# EAGLE board PCB v31 (EAGLE 9.7.0)
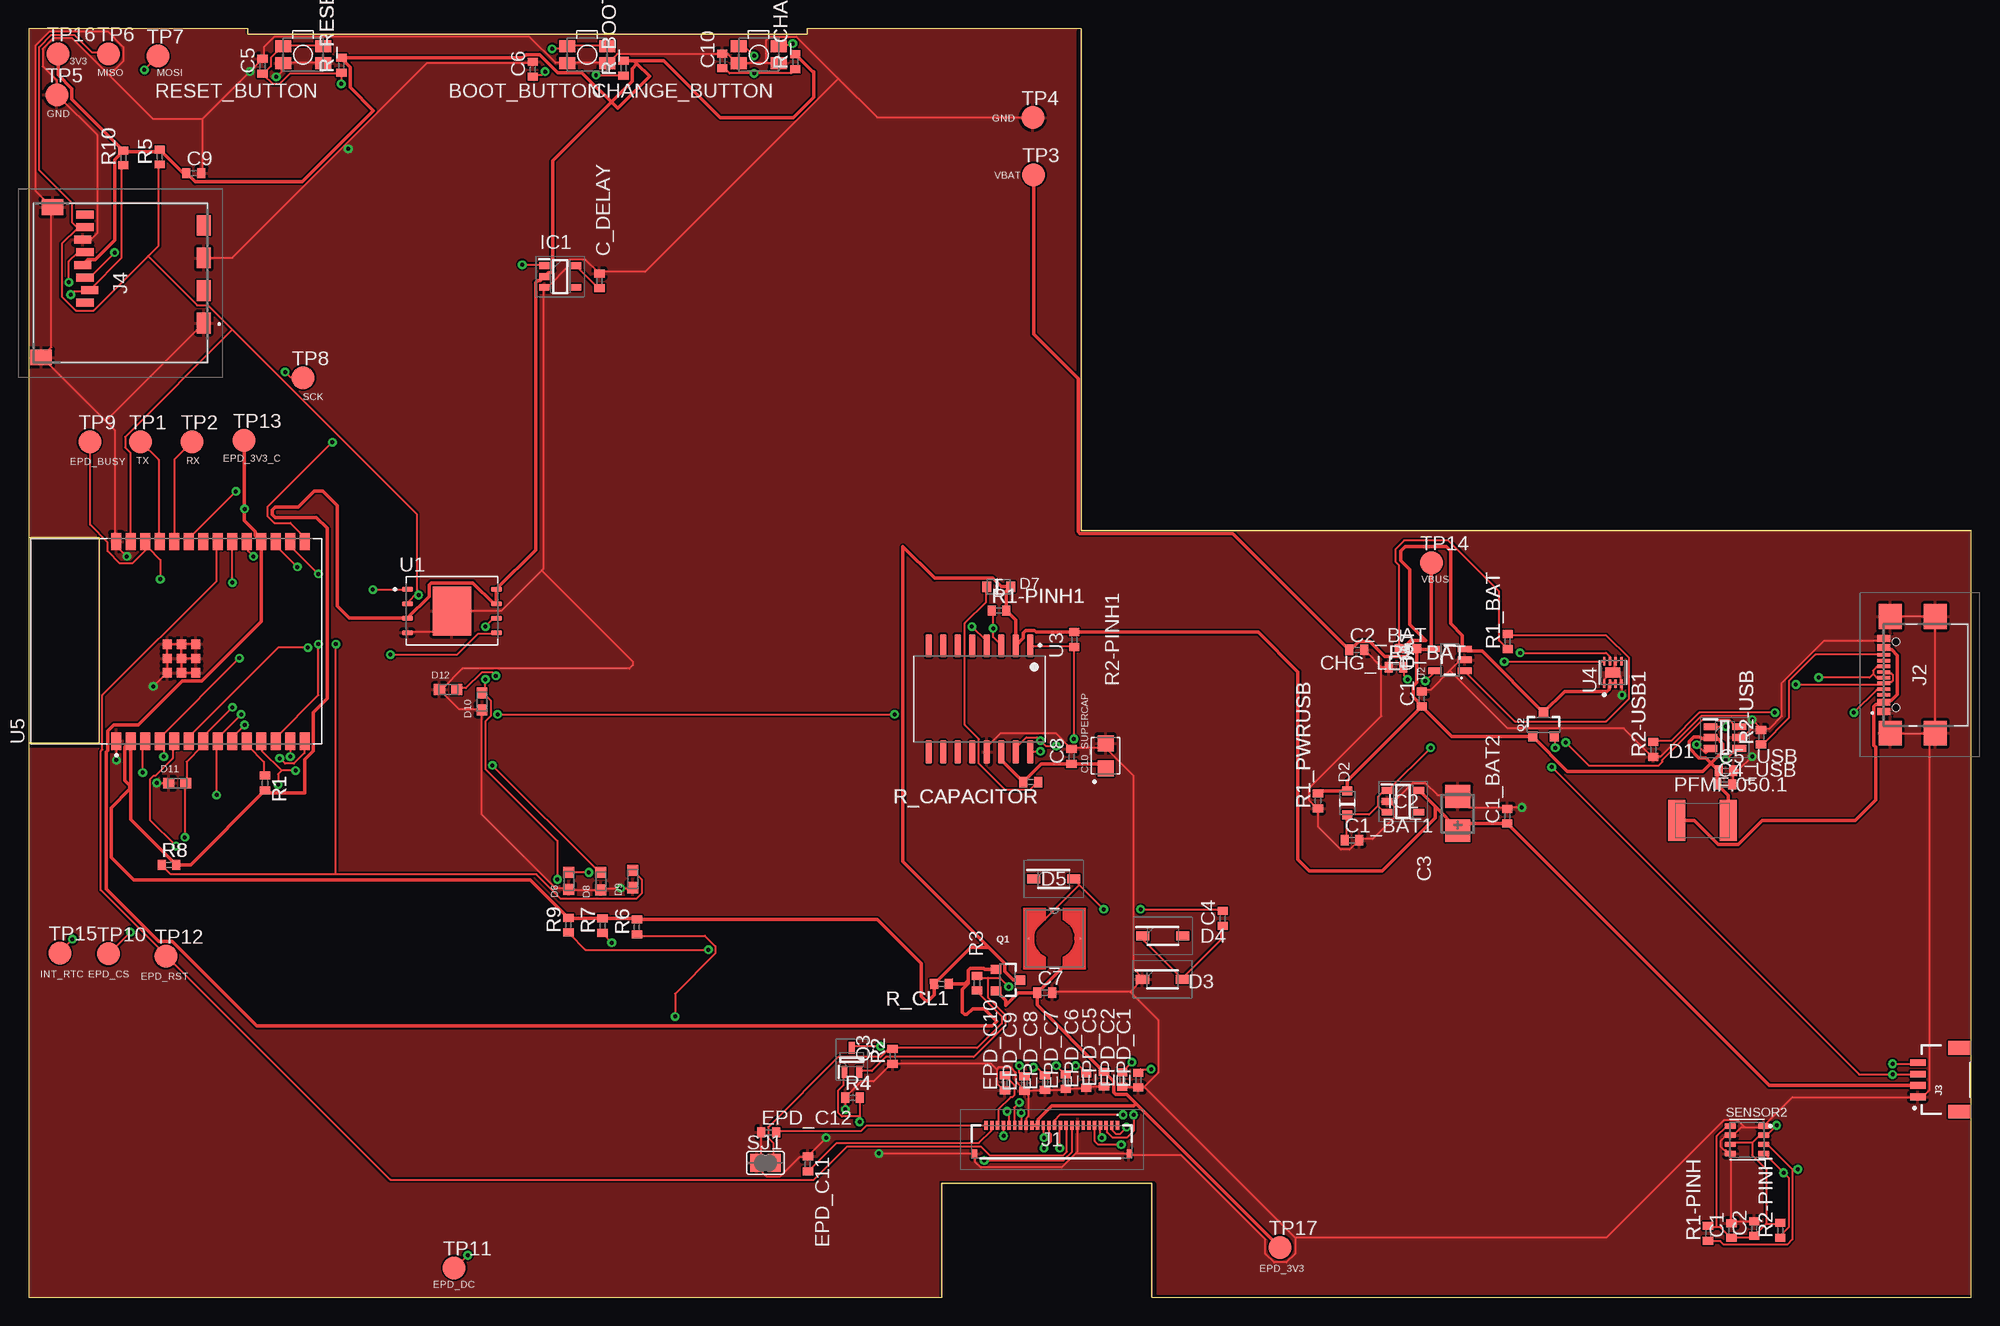
[diagram p0: board, top side]
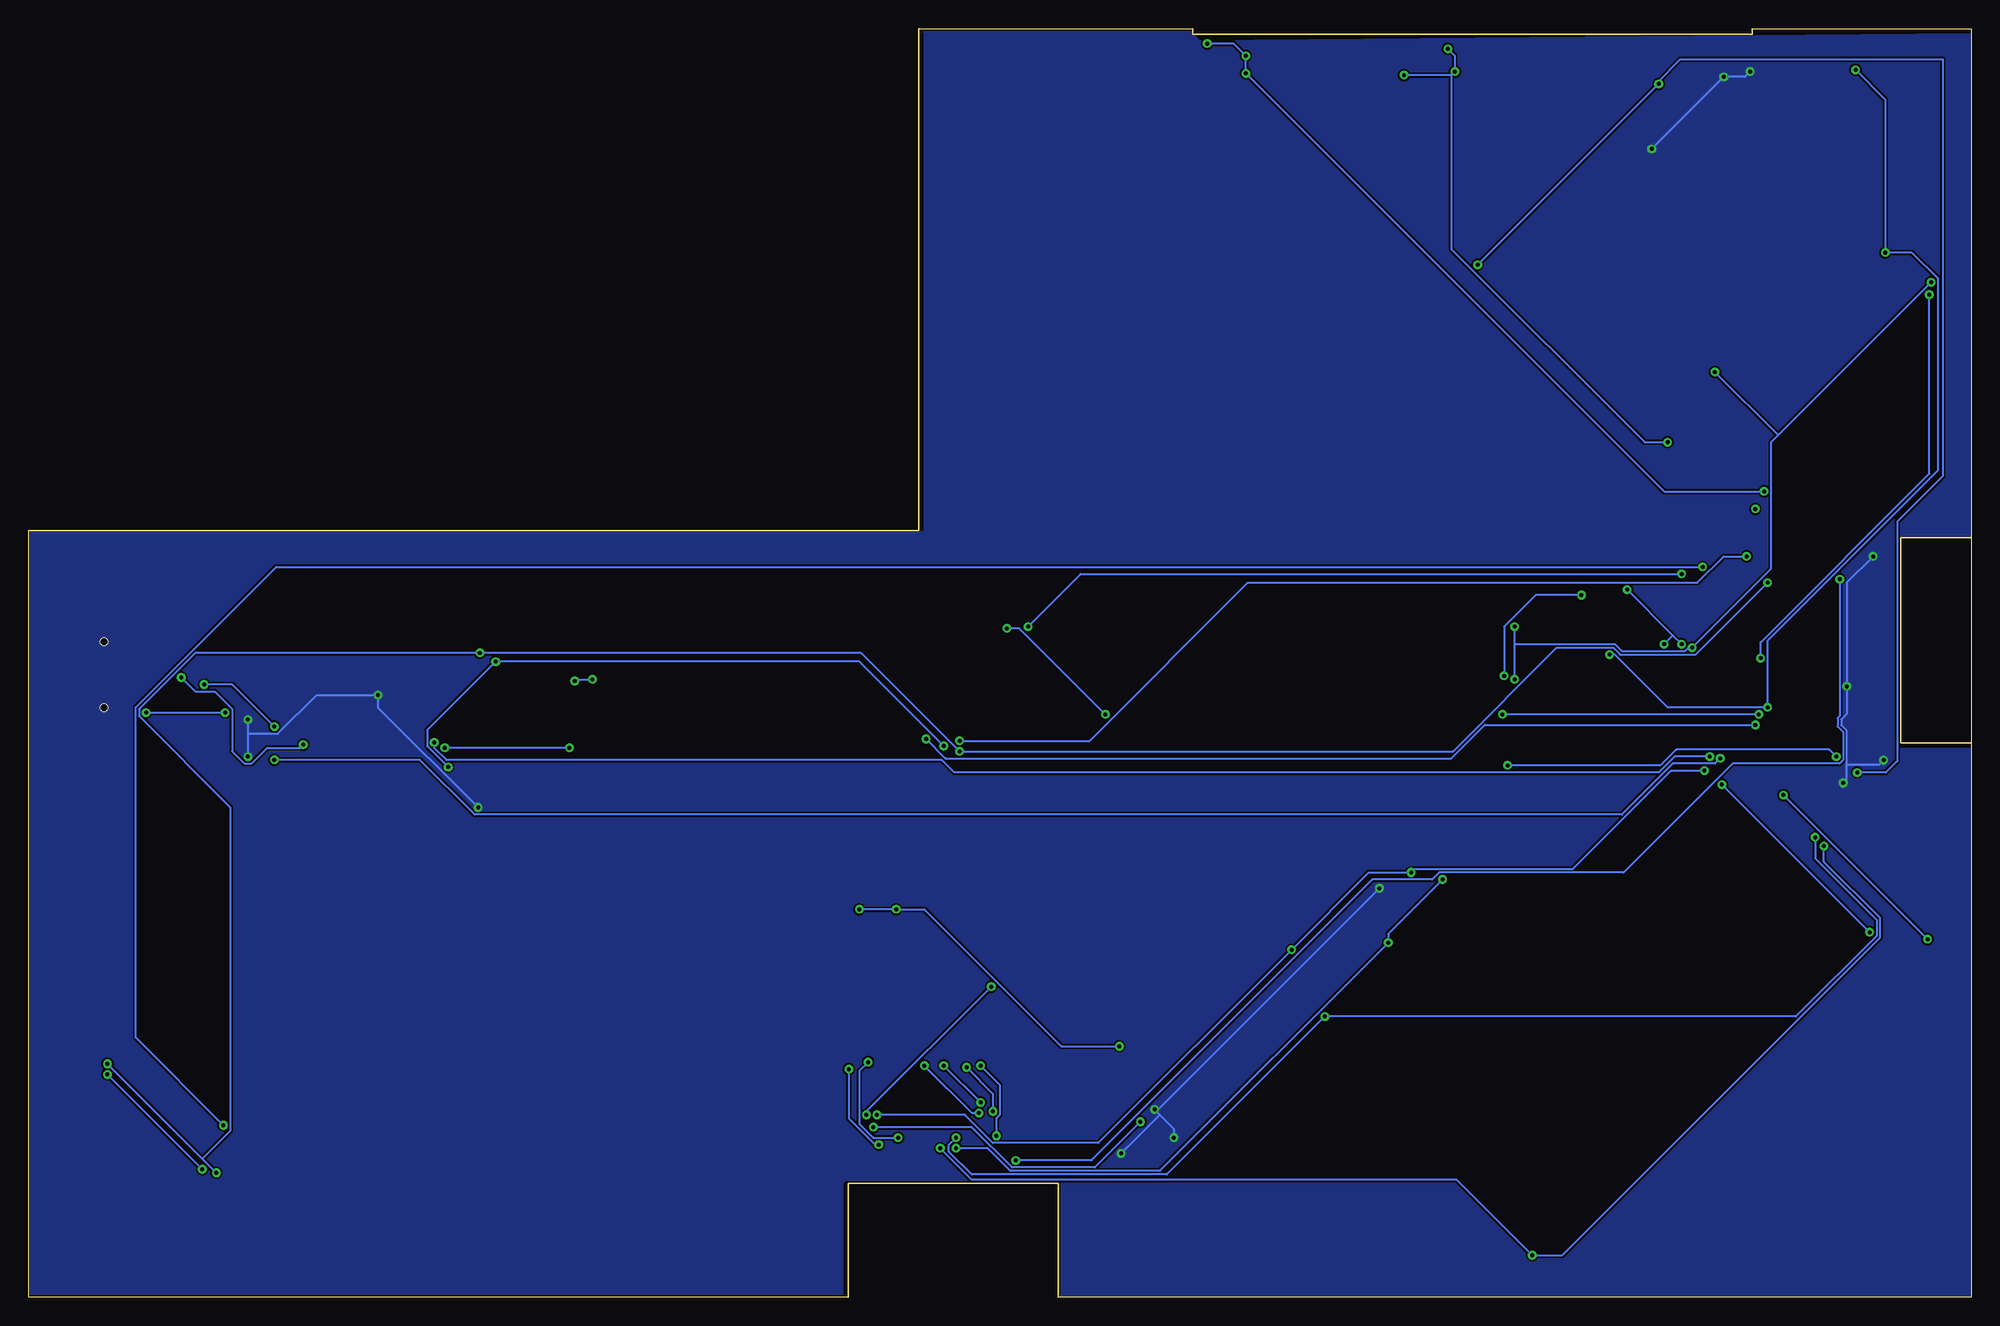
[diagram p1: board, bottom side, seen from below]

Size 170.2 x 111.2 mm. Coordinates in mm from the lower left corner, seen from the top.
Outline: 0,66.6 0,111.2 19.2,111.2 19.2,110.71 68.2,110.71 68.2,111.2 92.2,111.2 92.2,67.2 170.2,67.2 170.2,0 98.4,0 98.4,10 80,10 80,0 0,0 0,48.6
Outline: 0,66.6 0,48.6
Outline: 0,66.6 6.2,66.6 6.2,48.6 0,48.6
Copper layers (1*16): Top 0.035mm / dielectric 1.5mm / Bottom 0.035mm
Design rules "Fusion Electronics Design Rules *": minimum track width 0.1554mm, minimum drill 0.35mm, track to track 6mil, track to pad 6mil, pad to pad 6mil, via to via 6mil, smd to smd 6mil, copper to edge 0.016mm, drill to drill 6mil, minimum pad ring 10mil, minimum via ring 8mil, stop-mask expansion 4mil, vias tented up to drill 9999mil, thermal gap 10mil

## Footprints (pad centres in the part's own frame; a part is rotated, then mirrored left to right if it is on the bottom)
MYBUTTON = smd 1.4 x 1.05: 1 1.75,0.75; 2 -1.75,0.75; 3 -1.75,-0.75; 4 1.75,-0.75
ESP32_WROVER_EAGLE-LTSPICE_C0402 = smd 0.7 x 0.9: 1 -0.65,0; 2 0.65,0
EAGLE-LTSPICE_C0402 = smd 0.7 x 0.9: 1 -0.65,0; 2 0.65,0
RCL_CT3528 = smd 2 x 2.2: + -1.5,0; - 1.5,0
CAPCP3225X100N = smd 1.4 x 1.4: 1 -1.1,0; 2 1.1,0
ADAFRUIT_CHIP-LED0603 = smd 0.8 x 0.8: A 0,-0.75; C 0,0.75
SOT95P280X145-6N = smd 1.2 x 0.6: 1 -1.25,0.95; 2 -1.25,0; 3 -1.25,-0.95; 4 1.25,-0.95; 5 1.25,0; 6 1.25,0.95
ESP32_WROVER_AVX---SD0805S020S1R0_AVX_SD0805S020S1R0_0 = smd 0.8 x 0.9: 1 -1.05,0; 2 1.05,0
SOD3716X135N = smd 1.15 x 0.8: 1 -1.75,0; 2 1.75,0
DIOC1608X36N = smd 0.97 x 0.94: 1 -0.75,0; 2 0.75,0
SOT95P280X125-5N = smd 0.9 x 0.6: 1 -1.4,0.95; 2 -1.4,0; 3 -1.4,-0.95; 4 1.4,-0.95; 5 1.4,0.95
SOT95P280X120-5N = smd 0.9 x 0.6: 1 -1.4,0.95; 2 -1.4,0; 3 -1.4,-0.95; 4 1.4,-0.95; 5 1.4,0.95
FH34SRJ24S05SH99 = smd 0.3 x 0.8: 1 5.75,1.45; 2 5.25,1.45; 3 4.75,1.45; 4 4.25,1.45; 5 3.75,1.45; 6 3.25,1.45; 7 2.75,1.45; 8 2.25,1.45; 9 1.75,1.45; 10 1.25,1.45; 11 0.75,1.45; 12 0.25,1.45; 13 -0.25,1.45; 14 -0.75,1.45; 15 -1.25,1.45; 16 -1.75,1.45; 17 -2.25,1.45; 18 -2.75,1.45; 19 -3.25,1.45; 20 -3.75,1.45; 21 -4.25,1.45; 22 -4.75,1.45; 23 -5.25,1.45; 24 -5.75,1.45 | smd 0.4 x 0.8: MP1 6.75,-1.05; MP2 -6.75,-1.05
SAMACSYS_PARTS_USB4110GFA = smd 0.3 x 1.15: A1 -3.35,3.678; A4 -2.55,3.678; A5 -1.25,3.678; A6 -0.25,3.678; A7 0.25,3.678; A8 1.25,3.678; A9 2.55,3.678; A12 3.35,3.678; B1 3.05,3.678; B4 2.25,3.678; B5 1.75,3.678; B6 0.75,3.678; B7 -0.75,3.678; B8 -1.75,3.678; B9 -2.25,3.678; B12 -3.05,3.678 | smd 2.18 x 2: MP1 -5.11,-0.827; MP2 5.11,-0.827; MP3 -5.11,3.103; MP4 5.11,3.103 | hole 0.65: -2.89,2.603; 2.89,2.603
JST04_1MM_RA = smd 0.6 x 1.35: 1 -1.5,0; 2 -0.5,0; 3 0.5,0; 4 1.5,0 | smd 1.2 x 2: NC1 2.8,-3.675; NC2 -2.8,-3.675
112ATAARR03ATTEND = smd 1.8 x 1.2: G1 10.6,10.4; G2 4.9,10.4; S1 7.75,10.4; S2 2.05,10.4 | smd 1.4 x 1.9: G3 13.6,-3.85; G4 0.45,-2.85 | smd 0.7 x 1.5: P1 8.8,0; P2 7.7,0.4; P3 6.6,0; P4 5.5,-0.2; P5 4.4,0; P6 3.3,-0.2; P7 2.2,0; P8 1.1,0
IND_4828-WE-TPC_WRE = smd 0.127 x 0.127: 1 -2.286,0; 2 2.286,0
ESP32C6_VARISTOR_CT/CN1812 = smd 1.5 x 3.6: 1 -2.25,0; 2 2.25,0
ESP32_WROVER_SPARKFUN-DISCRETESEMI_SOT23-3 = smd 0.8 x 0.9: 1 -0.95,-1; 2 0.95,-1; 3 0,1.1
SOT65P210X110-3N = smd 1.05 x 0.5: 1 -1.05,0.65; 2 -1.05,-0.65; 3 1.05,0
ESP32_WROVER_EAGLE-LTSPICE_R0402 = smd 0.7 x 0.9: 1 -0.65,0; 2 0.65,0
ESP32_WROVER_BME680_PSON80P300X300X100-8N = smd 1.016 x 0.5: 1 1.458,1.2; 2 1.458,0.4; 3 1.458,-0.4; 4 1.458,-1.2; 5 -1.458,-1.22; 6 -1.458,-0.4; 7 -1.458,0.4; 8 -1.458,1.2
SJ = smd 1.168 x 1.6: 1 -0.762,0; 2 0.762,0
TP20R = smd 2 x 2: TP 0,0
SON127P600X800X80-9N = smd 0.94 x 0.44: 1 -3.895,1.905; 2 -3.895,0.635; 3 -3.895,-0.635; 4 -3.895,-1.905; 5 3.895,-1.905; 6 3.895,-0.635; 7 3.895,0.635; 8 3.895,1.905 | smd 3.4 x 4.3: 9 0,0
ESP32_WROVER_SPARKFUN-IC-POWER_SOT23-5 = smd 0.55 x 1.2: 1 -0.95,-1.3; 2 0,-1.3; 3 0.95,-1.3; 4 0.95,1.3; 5 -0.95,1.3
SOIC127P1032X265-16N = smd 2.05 x 0.59: 1 -4.655,4.445; 2 -4.655,3.175; 3 -4.655,1.905; 4 -4.655,0.635; 5 -4.655,-0.635; 6 -4.655,-1.905; 7 -4.655,-3.175; 8 -4.655,-4.445; 9 4.655,-4.445; 10 4.655,-3.175; 11 4.655,-1.905; 12 4.655,-0.635; 13 4.655,0.635; 14 4.655,1.905; 15 4.655,3.175; 16 4.655,4.445
SON50P200X200X80-9N = smd 0.76 x 0.27: 1 -0.985,0.75; 2 -0.985,0.25; 3 -0.985,-0.25; 4 -0.985,-0.75; 5 0.985,-0.75; 6 0.985,-0.25; 7 0.985,0.25; 8 0.985,0.75 | smd 0.9 x 1.3: 9 0,0
XCVR_ESP32-C6-WROOM-1-N8 = smd 1.5 x 0.9: 1 -8.75,5.26; 2 -8.75,3.99; 3 -8.75,2.72; 4 -8.75,1.45; 5 -8.75,0.18; 6 -8.75,-1.09; 7 -8.75,-2.36; 8 -8.75,-3.63; 9 -8.75,-4.9; 10 -8.75,-6.17; 11 -8.75,-7.44; 12 -8.75,-8.71; 13 -8.75,-9.98; 14 -8.75,-11.25; 15 8.75,-11.25; 16 8.75,-9.98; 17 8.75,-8.71; 18 8.75,-7.44; 19 8.75,-6.17; 20 8.75,-4.9; 21 8.75,-3.63; 22 8.75,-2.36; 23 8.75,-1.09; 24 8.75,0.18; 25 8.75,1.45; 26 8.75,2.72; 27 8.75,3.99; 28 8.75,5.26 | smd 0.8 x 0.8: 29_1 -2.755,0.79; 29_2 -1.505,0.79; 29_3 -0.255,0.79; 29_4 -2.755,-0.46; 29_5 -1.505,-0.46; 29_6 -0.255,-0.46; 29_7 -2.755,-1.71; 29_8 -1.505,-1.71; 29_9 -0.255,-1.71

## Placement (x,y rotation side)
BOOT_BUTTON  BUTTON_CUSYOMV1  [MYBUTTON]  48.93,108.91 180 top
C1  100nF  [ESP32_WROVER_EAGLE-LTSPICE_C0402]  149.17,5.86 90 top
C1_BAT  4.7uF  [ESP32_WROVER_EAGLE-LTSPICE_C0402]  122.05,52.45 90 top
C1_BAT1  4.7uF  [EAGLE-LTSPICE_C0402]  115.93,40.07 0 top
C1_BAT2  4.7uF  [EAGLE-LTSPICE_C0402]  129.53,42.17 90 top
C2  100nF  [ESP32_WROVER_EAGLE-LTSPICE_C0402]  151.17,6.04 90 top
C2_BAT  4.7uF  [ESP32_WROVER_EAGLE-LTSPICE_C0402]  116.36,56.75 0 top
C3  100uF TANT  [RCL_CT3528]  125.2,42.41 90 top
C4  4.7uF/25V  [ESP32_WROVER_EAGLE-LTSPICE_C0402]  104.61,33.21 90 top
C4_USB  100nF  [ESP32_WROVER_EAGLE-LTSPICE_C0402]  148.59,44.95 0 top
C5  1uF  [ESP32_WROVER_EAGLE-LTSPICE_C0402]  20.49,107.9 90 top
C5_USB  4.7uF  [ESP32_WROVER_EAGLE-LTSPICE_C0402]  148.7,46.15 0 top
C6  100nF  [ESP32_WROVER_EAGLE-LTSPICE_C0402]  44.17,107.62 90 top
C7  10uF  [ESP32_WROVER_EAGLE-LTSPICE_C0402]  89.02,26.71 0 top
C8  100nF  [ESP32_WROVER_EAGLE-LTSPICE_C0402]  91.37,47.4 90 top
C9  100nF  [ESP32_WROVER_EAGLE-LTSPICE_C0402]  14.48,98.53 0 top
C10  100nF  [ESP32_WROVER_EAGLE-LTSPICE_C0402]  60.77,108.36 90 top
C10_SUPERCAP  CPH3225A  [CAPCP3225X100N]  94.36,47.46 90 top
C_DELAY  100nF  [ESP32_WROVER_EAGLE-LTSPICE_C0402]  50.01,89.09 90 top
CHANGE_BUTTON  BUTTON_CUSYOMV1  [MYBUTTON]  63.96,108.91 180 top
CHG_LED  3.3  [ADAFRUIT_CHIP-LED0603]  120.85,56.87 90 top
D1  USBLC6-2SC6Y  [SOT95P280X145-6N]  148.6,49.07 0 top
D2  ESP32_WROVER_AVX---SD0805S020S1R0_AVX_SD0805S020S1R0_0_0AVX_SD0805S020S1R0_0_0  [ESP32_WROVER_AVX---SD0805S020S1R0_AVX_SD0805S020S1R0_0]  115.52,43.34 90 top
D3  MBR0530  [SOD3716X135N]  99.33,27.88 0 top
D4  MBR0530  [SOD3716X135N]  99.37,31.68 0 top
D5  MBR0530  [SOD3716X135N]  89.81,36.68 0 top
D6  PGB1010603MR  [DIOC1608X36N]  47.33,36.5 90 top
D7  ESP32_WROVER_AVX---SD0805S020S1R0_AVX_SD0805S020S1R0_0_0AVX_SD0805S020S1R0_0_0  [ESP32_WROVER_AVX---SD0805S020S1R0_AVX_SD0805S020S1R0_0]  84.99,62.28 0 top
D8  PGB1010603MR  [DIOC1608X36N]  50.13,36.48 90 top
D9  PGB1010603MR  [DIOC1608X36N]  52.93,36.66 90 top
D10  PGB1010603MR  [DIOC1608X36N]  39.73,52.24 90 top
D11  PGB1010603MR  [DIOC1608X36N]  13.02,45.07 0 top
D12  PGB1010603MR  [DIOC1608X36N]  36.75,53.28 0 top
EPD_C1  0.1uF/50V  [ESP32_WROVER_EAGLE-LTSPICE_C0402]  97.21,19.05 90 top
EPD_C2  0.1uF/50V  [ESP32_WROVER_EAGLE-LTSPICE_C0402]  95.81,19.09 90 top
EPD_C5  0.1uF/50V  [ESP32_WROVER_EAGLE-LTSPICE_C0402]  94.21,19.13 90 top
EPD_C6  1uF/50V  [ESP32_WROVER_EAGLE-LTSPICE_C0402]  92.65,19.01 90 top
EPD_C7  1uF/50V  [ESP32_WROVER_EAGLE-LTSPICE_C0402]  90.85,18.92 90 top
EPD_C8  1uF/50V  [ESP32_WROVER_EAGLE-LTSPICE_C0402]  89.05,18.83 90 top
EPD_C9  1uF/50V  [ESP32_WROVER_EAGLE-LTSPICE_C0402]  87.25,18.74 90 top
EPD_C10  1uF/50V  [ESP32_WROVER_EAGLE-LTSPICE_C0402]  85.53,18.81 90 top
EPD_C11  1uF/50V  [ESP32_WROVER_EAGLE-LTSPICE_C0402]  68.27,11.71 270 top
EPD_C12  1uF/50V  [ESP32_WROVER_EAGLE-LTSPICE_C0402]  64.85,14.47 0 top
IC1  BD5229G-TR  [SOT95P280X125-5N]  46.57,89.47 0 top
IC2  XC6220A331MR-G  [SOT95P280X120-5N]  120.41,43.47 0 top
J1  FH34SRJ-24S-0.5SH_99_  [FH34SRJ24S05SH99]  89.64,13.64 0 top
J2  SAMACSYS_PARTS_USB4110-GF-A  [SAMACSYS_PARTS_USB4110GFA]  166.2,54.56 90 top
J3  QWIIC_RIGHT_ANGLE  [JST04_1MM_RA]  165.51,19.08 90 top
J4  112A-TAAR-R03_ATTEND  [112ATAARR03ATTEND]  4.95,95.98 270 top
L1  744043680IND_4828-WE-TPC_WRE  [IND_4828-WE-TPC_WRE]  89.87,31.45 0 top
PFMF.050.1  ESP32C6_VARISTORCN1812  [ESP32C6_VARISTOR_CT/CN1812]  146.64,41.8 0 top
Q1  20V/4.2A/52mΩ/1.4W  [ESP32_WROVER_SPARKFUN-DISCRETESEMI_SOT23-3]  85.76,27.81 270 top
Q2  20V/4.2A/52mΩ/1.4W  [ESP32_WROVER_SPARKFUN-DISCRETESEMI_SOT23-3]  132.71,50.16 0 top
Q3  SI1308EDL-T1-GE3  [SOT65P210X110-3N]  72.12,20.84 90 top
R1  10k  [ESP32_WROVER_EAGLE-LTSPICE_R0402]  20.71,45.08 270 top
R1-PINH  10K  [ESP32_WROVER_EAGLE-LTSPICE_R0402]  147.13,5.63 90 top
R1-PINH1  10K  [ESP32_WROVER_EAGLE-LTSPICE_R0402]  85.01,60.19 0 top
R1_BAT  200  [ESP32_WROVER_EAGLE-LTSPICE_R0402]  129.57,57.48 90 top
R1_PWRUSB  100K  [ESP32_WROVER_EAGLE-LTSPICE_R0402]  112.96,43.52 90 top
R2  2.2  [ESP32_WROVER_EAGLE-LTSPICE_R0402]  75.69,21.14 90 top
R2-PINH  10K  [ESP32_WROVER_EAGLE-LTSPICE_R0402]  153.45,5.88 90 top
R2-PINH1  10K  [ESP32_WROVER_EAGLE-LTSPICE_R0402]  91.61,57.65 90 top
R2-USB  5k1  [ESP32_WROVER_EAGLE-LTSPICE_R0402]  151.77,49.1 90 top
R2-USB1  5k1  [ESP32_WROVER_EAGLE-LTSPICE_R0402]  142.33,48.01 90 top
R2_BAT  2K  [ESP32_WROVER_EAGLE-LTSPICE_R0402]  119.79,55.23 0 top
R3  0.47  [ESP32_WROVER_EAGLE-LTSPICE_R0402]  83.09,27.54 90 top
R4  10K  [ESP32_WROVER_EAGLE-LTSPICE_R0402]  72.18,17.51 0 top
R5  10k  [ESP32_WROVER_EAGLE-LTSPICE_R0402]  11.49,99.94 90 top
R6  10k  [ESP32_WROVER_EAGLE-LTSPICE_R0402]  53.29,32.46 90 top
R7  10k  [ESP32_WROVER_EAGLE-LTSPICE_R0402]  50.29,32.58 90 top
R8  10k  [ESP32_WROVER_EAGLE-LTSPICE_R0402]  12.3,37.91 0 top
R9  10k  [ESP32_WROVER_EAGLE-LTSPICE_R0402]  47.29,32.62 90 top
R10  10k  [ESP32_WROVER_EAGLE-LTSPICE_R0402]  8.29,99.86 90 top
R_BOOT  10K  [ESP32_WROVER_EAGLE-LTSPICE_R0402]  52.13,107.72 90 top
R_CAPACITOR  15  [ESP32_WROVER_EAGLE-LTSPICE_R0402]  87.78,45.16 180 top
R_CHANGE  10K  [ESP32_WROVER_EAGLE-LTSPICE_R0402]  67.16,108.29 90 top
R_CL1  10K  [ESP32_WROVER_EAGLE-LTSPICE_R0402]  79.97,27.48 180.6 top
R_RESET  10K  [ESP32_WROVER_EAGLE-LTSPICE_R0402]  27.41,107.97 90 top
RESET_BUTTON  BUTTON_CUSYOMV1  [MYBUTTON]  24.05,108.91 180 top
SENSOR2  ESP32_WROVER_BME680_BME680  [ESP32_WROVER_BME680_PSON80P300X300X100-8N]  150.54,13.82 0 top
SJ1  3.3  [SJ]  64.56,11.79 0 top
TP1  TPTP20R  [TP20R]  9.81,74.99 0 top
TP2  TPTP20R  [TP20R]  14.33,74.99 0 top
TP3  TPTP20R  [TP20R]  88.05,98.39 0 top
TP4  TPTP20R  [TP20R]  87.97,103.39 0 top
TP5  TPTP20R  [TP20R]  2.49,105.39 0 top
TP6  TPTP20R  [TP20R]  7.01,108.99 0 top
TP7  TPTP20R  [TP20R]  11.33,108.79 0 top
TP8  TPTP20R  [TP20R]  24.05,80.59 0 top
TP9  TPTP20R  [TP20R]  5.37,74.99 0 top
TP10  TPTP20R  [TP20R]  6.99,30.11 0 top
TP11  TPTP20R  [TP20R]  37.29,2.59 0 top
TP12  TPTP20R  [TP20R]  12.04,29.91 0 top
TP13  TPTP20R  [TP20R]  18.89,75.11 0 top
TP14  TPTP20R  [TP20R]  122.89,64.39 0 top
TP15  TPTP20R  [TP20R]  2.74,30.19 0 top
TP16  TPTP20R  [TP20R]  2.59,108.99 0 top
TP17  TPTP20R  [TP20R]  109.64,4.39 0 top
U1  W25Q512JVEIQ  [SON127P600X800X80-9N]  37.09,60.16 0 top
U2  ESP32_WROVER_SPARKFUN-IC-POWER_MCP73831  [ESP32_WROVER_SPARKFUN-IC-POWER_SOT23-5]  124.51,55.88 90 top
U3  DS3231SN#  [SOIC127P1032X265-16N]  83.3,52.45 270 top
U4  MAX17048G+T10  [SON50P200X200X80-9N]  138.78,54.77 90 top
U5  ESP32-C6-WROOM-1-N8  [XCVR_ESP32-C6-WROOM-1-N8]  12.94,57.5 90 top

## Library data of the parts
BOOT_BUTTON CHANGE_BUTTON CHG_LED PFMF.050.1 RESET_BUTTON SJ1 TP1-TP17 = DeskAssistant v19 v1
C1 C1_BAT C1_BAT1 C1_BAT2 C2 C2_BAT C4 C4_USB C5 C5_USB C6-C10 C_DELAY EPD_C1 EPD_C2 EPD_C5-EPD_C12 = DeskAssistant v19 v1; SPICEMODEL: NONE; SPICEPREFIX: C
C3 = DeskAssistant v19 v1; SPICEPREFIX: C
C10_SUPERCAP = DeskAssistant v19 v1; AVAILABILITY: Not in stock; CHECK_PRICES: https://www.snapeda.com/parts/CPH3225A/Seiko+Instruments/view-part/?ref=eda; DESCRIPTION: 11 mF (EDLC) Supercapacitor 3.3 V 1210 (3225 Metric) - -; MF: Seiko Instruments; MP: CPH3225A; PACKAGE: 1210 Seiko; PRICE: None; PURCHASE-URL: https://www.snapeda.com/api/url_track_click_mouser/?unipart_id=562593&manufacturer=Seiko Instruments&part_name=CPH3225A&search_term=None; SNAPEDA_LINK: https://www.snapeda.com/parts/CPH3225A/Seiko+Instruments/view-part/?ref=snap
D1 = DeskAssistant v19 v1; AVAILABILITY: In Stock; CHECK_PRICES: https://www.snapeda.com/parts/USBLC6-2SC6Y/STMicroelectronics/view-part/?ref=eda; DESCRIPTION: 17V Clamp 5A (8/20µs) Ipp Tvs Diode Surface Mount SOT-23-6; MF: STMicroelectronics; MP: USBLC6-2SC6Y; PACKAGE: SOT-23-6 STMicroelectronics; PRICE: None; SNAPEDA_LINK: https://www.snapeda.com/parts/USBLC6-2SC6Y/STMicroelectronics/view-part/?ref=snap
D2 D7 = DeskAssistant v19 v1; CENTROID_NOT_SPECIFIED: No; DATASHEET: http://datasheets.avx.com/schottky.pdf; DIGIKEY_DESCRIPTION: DIODE SCHOTTKY 20V 1A 0805; DIGIKEY_PART_NUMBER: 478-7800-1-ND; LEAD_FREE: yes; MF: AVX; MOUSER_PART_NUMBER: 581-SD0805S020S1R0; PACKAGE: 0805 (2012 metric); PREFIX: D; ROHS: yes; TEMPERATURE_RANGE_HIGH: +125°C; TEMPERATURE_RANGE_LOW: -55°C
D3-D5 = DeskAssistant v19 v1; AVAILABILITY: In Stock; CHECK_PRICES: https://www.snapeda.com/parts/MBR0530/Onsemi/view-part/?ref=eda; DESCRIPTION: Diode Schottky 30 V 500mA Surface Mount SOD-123; MF: ON Semiconductor; MP: MBR0530; PACKAGE: SOD-123-2 ON Semiconductor; PRICE: None; PURCHASE-URL: https://www.snapeda.com/api/url_track_click_mouser/?unipart_id=179458&manufacturer=ON Semiconductor&part_name=MBR0530&search_term=None; SNAPEDA_LINK: https://www.snapeda.com/parts/MBR0530/Onsemi/view-part/?ref=snap
D6 D8-D12 = DeskAssistant v19 v1; AVAILABILITY: In Stock; CHECK_PRICES: https://www.snapeda.com/parts/PGB1010603MR/Littelfuse/view-part/?ref=eda; DESCRIPTION: 150V (Typ) Clamp - Ipp Tvs Diode Surface Mount 0603 (1608 Metric); MF: Littelfuse Inc.; MP: PGB1010603MR; PACKAGE: 0603 Littelfuse Inc.; PRICE: None; PURCHASE-URL: https://www.snapeda.com/api/url_track_click_mouser/?unipart_id=5659453&manufacturer=Littelfuse Inc.&part_name=PGB1010603MR&search_term=None; SNAPEDA_LINK: https://www.snapeda.com/parts/PGB1010603MR/Littelfuse/view-part/?ref=snap
IC1 = DeskAssistant v19 v1; DESCRIPTION: Voltage Detector with Adjustable Delay Time: CMOS processes are utilized to develop high precision, low current consumption CMOS reset ICs that allow arbitrary setting of the delay time. The extensive lineup includes both Nch Open Drain and CMOS output types in a wide range of detection voltages (from 2.3V to 6.0V, in 0.1V steps), enabling selection of the ideal solution based on customer requirements. In addition, the entire series is of course both lead-free and RoHS-compliant.; HEIGHT: 1.25mm; MANUFACTURER_NAME: ROHM Semiconductor; MANUFACTURER_PART_NUMBER: BD5229G-TR; MOUSER_PART_NUMBER: 755-BD5229G-TR; MOUSER_PRICE-STOCK: https://www.mouser.co.uk/ProductDetail/ROHM-Semiconductor/BD5229G-TR?qs=4kLU8WoGk0vvnhrrYwdszw%3D%3D
IC2 = DeskAssistant v19 v1; DESCRIPTION: LDO Voltage Regulators; HEIGHT: 1.2mm; MANUFACTURER_NAME: Torex; MANUFACTURER_PART_NUMBER: XC6220A331MR-G; MOUSER_PART_NUMBER: 865-XC6220A331MR-G; MOUSER_PRICE-STOCK: https://www.mouser.co.uk/ProductDetail/Torex-Semiconductor/XC6220A331MR-G?qs=AsjdqWjXhJ8ZSWznL1J0gg%3D%3D
J1 = DeskAssistant v19 v1; DESCRIPTION: 24 Position FFC, FPC Connector Contacts, Top and Bottom 0.020" (0.50mm) Surface Mount, Right Angle; HEIGHT: 1.1mm; MANUFACTURER_NAME: Hirose; MANUFACTURER_PART_NUMBER: FH34SRJ-24S-0.5SH(99); MOUSER_PART_NUMBER: 798-FH34SRJ24S05SH99; MOUSER_PRICE-STOCK: https://www.mouser.co.uk/ProductDetail/Hirose-Connector/FH34SRJ-24S-0.5SH99?qs=vcbW%252B4%252BSTIpKBl5ap9J8Fw%3D%3D
J2 = DeskAssistant v19 v1; DESCRIPTION: CONN USB 2.0 TYPE-C R/A SMT; HEIGHT: 3.26mm; MANUFACTURER_NAME: GCT (GLOBAL CONNECTOR TECHNOLOGY); MANUFACTURER_PART_NUMBER: USB4110-GF-A; MOUSER_PART_NUMBER: 640-USB4110-GF-A; MOUSER_PRICE-STOCK: https://www.mouser.co.uk/ProductDetail/GCT/USB4110-GF-A?qs=KUoIvG%2F9IlYiZvIXQjyJeA%3D%3D
J3 = DeskAssistant v19 v1; PROD_ID: CONN-13694
J4 = DeskAssistant v19 v1; DESCRIPTION: Micro SD Card Socket, Push-Push Type, Top Mount, SMT, H=1.83mm, 10u; HEIGHT: 1.9mm; MANUFACTURER_NAME: ATTEND; MANUFACTURER_PART_NUMBER: 112A-TAAR-R03 ATTEND
L1 = DeskAssistant v19 v1; COPYRIGHT: Copyright (C) 2024 Ultra Librarian. All rights reserved.; MANUFACTURER_PART_NUMBER: 744043680; MFR_NAME: Wurth Electronics
Q1 Q2 = DeskAssistant v19 v1; PROD_ID: TRAN-14388
Q3 = DeskAssistant v19 v1; AVAILABILITY: In Stock; CHECK_PRICES: https://www.snapeda.com/parts/SI1308EDL-T1-GE3/Vishay+Siliconix/view-part/?ref=eda; DESCRIPTION: Si1308EDL-T1-GE3 N-channel MOSFET Transistor, 1.5 A, 30 V, 3-Pin SC-70 | Siliconix / Vishay SI1308EDL-T1-GE3; MF: Vishay Siliconix; MP: SI1308EDL-T1-GE3; PACKAGE: SOT-323 Vishay Semiconductor; PRICE: None; PURCHASE-URL: https://www.snapeda.com/api/url_track_click_mouser/?unipart_id=274603&manufacturer=Vishay Siliconix&part_name=SI1308EDL-T1-GE3&search_term=None; SNAPEDA_LINK: https://www.snapeda.com/parts/SI1308EDL-T1-GE3/Vishay+Siliconix/view-part/?ref=snap
R1 R1-PINH R1-PINH1 R1_BAT R1_PWRUSB R2 R2-PINH R2-PINH1 R2-USB R2-USB1 R2_BAT R3-R10 R_BOOT R_CAPACITOR R_CHANGE R_CL1 R_RESET = DeskAssistant v19 v1; SPICEMODEL: NONE; SPICEPREFIX: R
SENSOR2 = DeskAssistant v19 v1; AVAILABILITY: Unavailable; DESCRIPTION: Integrated Environmental Unit; MF: Bosch Sensortec; MP: BME680; PACKAGE: LGA-8 Bosch Tools; PRICE: None
U1 = DeskAssistant v19 v1; AVAILABILITY: In Stock; CHECK_PRICES: https://www.snapeda.com/parts/W25Q512JVEIQ/Winbond+Electronics/view-part/?ref=eda; DESCRIPTION: FLASH - NOR Memory IC 512Mb (64M x 8) SPI - Quad I/O 133 MHz 8-WSON (8x6); MF: Winbond Electronics; MP: W25Q512JVEIQ; PACKAGE: Package; PRICE: None; SNAPEDA_LINK: https://www.snapeda.com/parts/W25Q512JVEIQ/Winbond+Electronics/view-part/?ref=snap
U2 = DeskAssistant v19 v1; PROD_ID: IC-09995
U3 = DeskAssistant v19 v1; AVAILABILITY: In Stock; CHECK_PRICES: https://www.snapeda.com/parts/DS3231SN%23/Analog+Devices/view-part/?ref=eda; DESCRIPTION: Extremely Accurate I²C-Integrated RTC/TCXO/Crystal; MF: Analog Devices; MP: DS3231SN#; PACKAGE: SOIC-16 Maxim; PRICE: None; PURCHASE-URL: https://www.snapeda.com/api/url_track_click_mouser/?unipart_id=99048&manufacturer=Analog Devices&part_name=DS3231SN#&search_term=None; SNAPEDA_LINK: https://www.snapeda.com/parts/DS3231SN%23/Analog+Devices/view-part/?ref=snap
U4 = DeskAssistant v19 v1; AVAILABILITY: In Stock; CHECK_PRICES: https://www.snapeda.com/parts/MAX17048G+T10/Analog+Devices/view-part/?ref=eda; DESCRIPTION: 3µA 1-Cell/2-Cell Fuel Gauge with ModelGauge; MF: Analog Devices; MP: MAX17048G+T10; PACKAGE: TDFN-8 Maxim; PRICE: None; PURCHASE-URL: https://www.snapeda.com/api/url_track_click_mouser/?unipart_id=329239&manufacturer=Analog Devices&part_name=MAX17048G+T10&search_term=None; SNAPEDA_LINK: https://www.snapeda.com/parts/MAX17048G+T10/Analog+Devices/view-part/?ref=snap
U5 = DeskAssistant v19 v1; AVAILABILITY: In Stock; CHECK_PRICES: https://www.snapeda.com/parts/ESP32-C6-WROOM-1-N8/Espressif+Systems/view-part/?ref=eda; DESCRIPTION: Multiprotocol Modules ESP32-C6 module, Wi-Fi 6 in 2.4 GHz band, Bluetooth 5, Zigbee 3.0 and Thread. ESP34-WROOM Compatible - ENGINEERING SAMPLE; MF: Espressif Systems; MP: ESP32-C6-WROOM-1-N8; PACKAGE: None; PRICE: None; SNAPEDA_LINK: https://www.snapeda.com/parts/ESP32-C6-WROOM-1-N8/Espressif+Systems/view-part/?ref=snap

## Nets
3V3: C1_BAT2.1 C3.+ C9.1 D7.2 IC1.2 IC2.5 J3.2 J4.P4 Q1.3 R1-PINH1.2 R1.2 R2-PINH1.2 R5.2 R6.2 R7.2 R8.2 R9.2 R10.2 R_BOOT.2 R_CHANGE.2 R_CL1.2 R_RESET.2 TP16.TP U1.3 U1.7 U1.8 U3.2 U5.2
32KHZ: R2-PINH1.1 U3.1 U5.9
DN: D1.1 J2.A7 J2.B7
DP: D1.3 J2.A6 J2.B6
EPD_3V3: C7.1 EPD_C5.2 J1.15 J1.16 L1.2 Q1.2 TP17.TP
EPD_3V3_C: Q1.1 R_CL1.1 TP13.TP U5.18
EPD_BUSY: J1.9 TP9.TP U5.26
EPD_CS: D6.2 J1.12 R9.1 TP10.TP U5.11
EPD_DC: J1.11 TP11.TP U5.5
EPD_RST: J1.10 TP12.TP U5.21
FLASH_CS: D9.2 R8.1 U1.1 U5.12
GDR: J1.2 Q3.1 R4.2
GND: BOOT_BUTTON.1 BOOT_BUTTON.2 C1.2 C1_BAT1.2 C1_BAT2.2 C1_BAT.2 C2.2 C2_BAT.2 C3.- C4_USB.2 C5.2 C5_USB.2 C6.2 C7.2 C8.2 C9.2 C10.2 C10_SUPERCAP.2 C_DELAY.2 CHANGE_BUTTON.1 CHANGE_BUTTON.2 D1.5 D3.1 D6.1 D8.1 D9.1 D10.1 D11.1 D12.1 EPD_C1.1 EPD_C2.1 EPD_C5.1 EPD_C6.1 EPD_C7.1 EPD_C8.1 EPD_C9.1 EPD_C10.1 EPD_C11.1 EPD_C12.1 IC1.3 IC2.2 J1.8 J1.17 J1.MP1 J1.MP2 J2.A1 J2.A12 J2.B1 J2.B12 J2.MP1 J2.MP2 J2.MP3 J2.MP4 J3.1 J4.G1 J4.G2 J4.G3 J4.G4 J4.P6 R1_PWRUSB.1 R2-USB1.1 R2-USB.2 R2.1 R2_BAT.1 R4.1 RESET_BUTTON.1 RESET_BUTTON.2 SENSOR2.1 SENSOR2.5 SENSOR2.7 SJ1.1 TP4.TP TP5.TP U1.4 U1.9 U2.2 U3.13 U4.1 U4.4 U4.6 U4.9 U5.1 U5.28 U5.29_1 U5.29_2 U5.29_3 U5.29_4 U5.29_5 U5.29_6 U5.29_7 U5.29_8 U5.29_9
GPIO8: R1.1 U5.10
I2C_PW: C1.1 C2.1 R1-PINH.2 R2-PINH.2 SENSOR2.2 SENSOR2.6 SENSOR2.8 U5.17
INT_RTC: R1-PINH1.1 TP15.TP U3.3 U5.8
IO/BOOT: BOOT_BUTTON.3 BOOT_BUTTON.4 C6.1 R_BOOT.1 U5.15
IO/CHANGE: C10.1 CHANGE_BUTTON.3 CHANGE_BUTTON.4 R_CHANGE.1 U5.23
MISO: D12.2 J4.P7 R5.1 TP6.TP U1.2 U5.27
MOSI: D11.2 J1.14 J4.P3 R6.1 TP7.TP U1.5 U5.7
N$1: J2.B5 R2-USB.1
N$2: D7.1 R_CAPACITOR.1
N$3: J2.A5 R2-USB1.2
N$4: EPD_C11.2 J1.23
N$5: EPD_C10.2 J1.22
N$6: EPD_C9.2 J1.21
N$7: C4.1 D3.2 D4.1
N$8: EPD_C8.2 J1.20
N$9: EPD_C7.2 J1.19
N$10: EPD_C6.2 J1.18
N$11: C_DELAY.1 IC1.5
N$13: R1_BAT.2 U2.1
N$14: CHG_LED.C R1_BAT.1
N$15: C1_BAT1.1 D2.1 IC2.1 IC2.3 Q2.2
N$16: R2_BAT.2 U2.5
N$17: EPD_C1.2 J1.5
N$18: EPD_C2.2 J1.4
N$19: EPD_C12.2 J1.24
PREVGH: D5.1
PREVGL: D4.2
RESE: J1.3 Q3.2 R3.2
RESE': R2.2 R3.1 SJ1.2
RESET: C5.1 IC1.1 R_RESET.1 RESET_BUTTON.3 RESET_BUTTON.4 U5.3
RTC_RST: U3.4 U5.16
RX: TP2.TP U5.24
SCK: D10.2 J1.13 J4.P5 R7.1 TP8.TP U1.6 U5.6
SCL: J3.4 R2-PINH.1 SENSOR2.4 U3.16 U4.7 U5.20
SDA: J3.3 R1-PINH.1 SENSOR2.3 U3.15 U4.8 U5.19
SRC: C4.2 D5.2 L1.1 Q3.3
SS_SD: D8.2 J4.P2 R10.1 U5.4
TX: TP1.TP U5.25
USB_D+: D1.4 U5.14
USB_D-: D1.6 U5.13
VBAT: C2_BAT.1 Q2.3 TP3.TP U2.3 U4.2 U4.3
VBUS: C1_BAT.1 C4_USB.1 C5_USB.1 CHG_LED.A D1.2 D2.2 PFMF.050.1.2 Q2.1 R1_PWRUSB.2 TP14.TP U2.4
VRTC: C8.1 C10_SUPERCAP.1 R_CAPACITOR.2 U3.14
VUSB: J2.A4 J2.A9 J2.B4 J2.B9 PFMF.050.1.1

## Tracks (layer width: path | path; a pad name or v marks a point on that pad's centre or on a via)
3V3
  Top 0.3: 53.3,108.1 54.4,107 51.6,104.2 48.47,107.33 46.35,107.33 44.76,108.92 43.59,108.92 43.29,108.62 R_RESET.2 27.41,108.55 28.16,107.8 28.16,106.04 30.2,104 23.98,97.78 14.58,97.78 C9.1 13.55,98.53 R5.2 11.3,100.4 8.4,100.4 R10.2 | 53.3,108.1 53.03,108.37 | 53.03,108.37 R_BOOT.2 | R10.2 3.79,105.01 3.79,105.93 2.59,107.13 TP16.TP | J4.P4 5.2,90.93 5.83,90.93 7.54,92.64 7.54,99.69 8.29,100.44 R10.2 | 53.3,108.1 52.88,107.68 52.88,106.59 45.92,99.64 45.92,90 45.74,89.82 45.52,89.82 IC1.2 44.82,89.12 44.59,89.12 44.42,88.94 44.42,65.5 U1.8 U1.7 40.73,60.8 38.91,62.61 35.27,62.61 35.09,62.44 35.09,61.42 U1.3 28.11,59.52 27.05,60.59 27.05,69.39 25.79,70.65 25.01,70.65 23.61,69.25 21.61,69.25 21.35,68.99 21.35,68.61 21.61,68.35 25.21,68.35 26.15,67.41 26.15,52.48 24.94,51.27 24.94,47.88 24.2,47.13 24.2,44.2 20.94,44.2 R1.2 14.19,37.91 R8.2 8.95,41.91 U5.2 8.43,48.23 8.43,45.3 8.88,44.86 8.88,44.54 7.25,42.91 7.25,38.55 9.2,36.6 43.96,36.6 R9.2 47.33,33.23 R7.2 53.17,33.23 R6.2 74.36,33.11 78.2,29.27 78.2,26.4 78.6,26 78.8,26 79.32,26.52 R_CL1.2 82.55,30.7 84.1,30.7 | Q1.3 86.26,27.81 85.51,28.56 85.51,29.29 84.1,30.7 | 84.1,30.7 76.6,38.2 76.6,65.8 79.37,63.03 84.47,63.03 85.22,62.28 D7.2 85.66,61.9 R1-PINH1.2 86.47,59.38 U3.2 87.15,57.78 87.15,58.21 87.37,58.43 88.12,58.43 88.25,58.3 R2-PINH1.2 107.73,58.3 111.2,54.83 111.2,38.4 112.2,37.4 118.6,37.4 123.22,42.02 123.22,43.02 | IC2.5 123.22,43.02 | 123.22,43.02 125.2,41.03 C3.+ 125.81,41.52 C1_BAT2.1 152.47,18.58 J3.2 | R_CHANGE.2 68.7,107.4 68.8,107.4 68.8,105.2 67,103.4 60.6,103.4 55.63,108.37 53.03,108.37
32KHZ  (via drill 0.35)
  Top 0.155: U3.1 87.88,57.1 91.57,57.1 R2-PINH1.1 91.57,56.94 v91.57,48.94 | v18.93,50.17 17.85,49.09 17.85,48.79 U5.9
  Bottom 0.155: v18.93,50.17 42.63,50.17 45.55,47.25 89.88,47.25 v91.57,48.94
DN  (via drill 0.35)
  Top 0.155: v154.82,53.71 162.36,53.71 J2.B7 162.64,53.93 163.19,53.93 163.32,54.06 163.32,54.55 163.19,54.69 162.64,54.69 J2.A7 | v148.67,50.02 147.44,50.02 D1.1
  Bottom 0.155: v154.82,53.71 152.36,53.71 v148.67,50.02
DP  (via drill 0.35)
  Top 0.155: 161.59,54.63 161.9,54.33 162.36,54.33 J2.A6 | 161.59,54.63 161.59,54.94 161.9,55.25 162.36,55.25 J2.B6 | v156.82,54.33 161.29,54.33 161.59,54.63 | D1.3 146.9,47.67 v146.14,48.44
  Bottom 0.155: v156.82,54.33 155.59,53.1 153.9,53.1 152.36,51.56 152.36,47.86 151.28,46.79 150.67,46.79 149.28,48.17 146.41,48.17 v146.14,48.44
EPD_3V3
  Top 0.3: J1.16 J1.15 88.44,15.14 88.44,15.62 89.62,16.8 96.8,16.8 97,17 96.21,17.79 96.2,17.79 | TP17.TP 109.6,4.39 96.2,17.79 | 96.2,17.79 95.23,17.79 95.06,17.96 95.06,18.93 EPD_C5.2 88.37,25.62 C7.1 | C7.1 86.71,26.71 85.6,25.6 85.6,26.02 Q1.2 | C7.1 92.16,30.5 L1.2
EPD_3V3_C  (via drill 0.35)
  Top 0.155: v18.93,69.1 18.89,69.1
  Top 0.3: Q1.1 83.75,28.76 83.67,28.84 82.52,28.84 82.34,28.66 82.34,27.8 | 82.34,27.8 82.34,27.54 81.8,27 81.8,25 82,24.8 82.2,24.8 82.7,25.3 83.7,25.3 84.8,24.2 84.4,23.8 19.99,23.8 12.58,31.21 11.39,31.21 6.8,35.8 6.8,47.8 6.93,47.93 6.93,49.62 7.48,50.18 9.62,50.18 13.48,54.04 15.18,54.04 20.38,59.25 U5.18 19.86,66.77 19.86,67.12 18.89,68.1 18.89,69.1 TP13.TP | R_CL1.1 82.02,27.49 82.34,27.8
EPD_BUSY  (via drill 0.35)
  Top 0.155: v83.72,12 90.65,12 91.42,12.77 91.42,15.08 J1.9 | v11.54,62.95 11.54,64.64 10.46,65.72 | 10.46,65.72 10.31,65.87 10.31,66.18 U5.26 10.46,65.72 | 10.46,65.72 9.08,64.33 8,64.33 6.93,65.41 6.93,66.18 5.39,67.72 5.39,74.95 TP9.TP
  Bottom 0.155: v83.72,12 77.1,12 52.48,36.63 47.25,36.63 46.63,37.24 30.47,37.24 20.93,46.79 11.54,46.79 11.24,47.09 11.24,49.55 11.72,50.02 11.72,50.78 11.54,50.95 v11.54,62.95
EPD_CS  (via drill 0.35)
  Top 0.155: v95.88,16.01 90.34,16.01 89.88,15.54 89.88,15.24 J1.12 | v59.56,30.47 48.79,30.47 47.4,31.86 R9.1 | v49.09,37.24 47.4,37.24 D6.2 | 22.16,46.17 20.47,47.86 20.47,48.63 U5.11 | v23.39,46.17 22.16,46.17 | v8.93,32.01 7.08,30.16 TP10.TP | v21.85,44.94 21.85,45.86 22.16,46.17
  Bottom 0.155: v95.88,16.01 88.19,16.01 85.72,13.54 76.49,13.54 v59.56,30.47 52.79,37.24 v49.09,37.24 48.79,37.55 34.94,37.55 26.32,46.17 v23.39,46.17 | v21.85,44.94 v8.93,32.01
EPD_DC  (via drill 0.35)
  Top 0.155: v90.34,13.08 90.34,15.08 J1.11 | v38.48,3.69 37.4,2.62 TP11.TP | v12.93,39.55 10.62,41.86 10.62,45.4 10.93,45.71 11.08,45.71 12.62,47.25 12.62,48.63 U5.5
  Bottom 0.155: v90.34,13.08 87.57,10.31 45.09,10.31 v38.48,3.69 35.86,3.69 8,31.55 8,33.24 12.93,38.17 v12.93,39.55
EPD_RST
  Top 0.155: J1.10 90.95,15.08 90.95,12.77 90.65,12.47 84.18,12.47 83.41,13.23 71.72,13.23 68.79,10.31 31.7,10.31 12.16,29.86 TP12.TP 12,30.01 6.31,35.7 6.31,47.86 6.46,48.02 6.46,52.79 16.47,62.79 16.47,66.18 U5.21
FLASH_CS  (via drill 0.35)
  Top 0.155: v30.16,62.02 33.09,62.02 U1.1 | v25.39,57.25 25.39,52.79 21.7,49.09 21.7,48.79 U5.12 | 26.93,37.09 44.48,37.09 46.63,34.94 53.25,34.94 53.71,35.4 53.71,36.63 52.94,37.4 D9.2 | 26.93,37.09 12.47,37.09 11.73,37.83 R8.1 | 26.93,37.09 v26.93,57.25
  Bottom 0.155: v25.39,57.25 26.16,58.02 | 26.16,58.02 v30.16,62.02 | v26.93,57.25 26.16,58.02
GDR  (via drill 0.35)
  Top 0.155: v96.19,14.93 95.57,14.31 95.26,14.31 94.96,14.62 94.96,15.08 J1.2 | 72.8,15.85 72.8,17.39 R4.2 | 72.8,15.85 v72.8,15.39 | 72.8,15.85 71.26,15.85 70.95,16.16 70.95,18.16 71.41,18.62 71.41,19.7 Q3.1
  Bottom 0.155: v96.19,14.93 87.57,14.93 84.03,11.39 76.8,11.39 v72.8,15.39
GND  (via drill 0.35)
  Top 0.155: 91.72,12.62 91.88,12.77 91.88,15.08 J1.8 | 91.72,12.62 90.49,11.39 83.41,11.39 82.95,11.85 82.95,12.47 J1.MP2 82.8,12.62 v74.49,12.62 | 91.72,12.62 96.34,12.62 J1.MP1 96.5,12.47 100.96,12.47 108.35,5.08 108.35,3.85 109.11,3.08 110.19,3.08 110.96,3.85 110.96,5.23 | EPD_C12.1 64.18,14.47 64.18,12.16 63.87,11.85 SJ1.1 63.87,11.7 63.87,11.39 64.64,10.62 65.87,10.62 67.56,12.31 68.18,12.31 EPD_C11.1 68.33,12.47 v69.87,14.01 | EPD_C5.1 94.19,18.47 92.8,18.47 EPD_C6.1 92.65,18.31 90.95,18.31 EPD_C7.1 90.8,18.16 89.11,18.16 EPD_C8.1 88.95,18.16 87.26,18.16 | J1.17 87.42,15.24 87.42,15.7 87.57,15.85 87.57,17.7 87.26,18.01 EPD_C9.1 87.26,18.16 | 84.8,20.01 84.8,18.78 85.42,18.16 EPD_C10.1 | 84.8,20.01 84.95,20.16 86.03,20.16 86.49,19.7 86.49,18.93 87.26,18.16 | 84.8,20.01 84.34,20.47 75.72,20.47 R2.1 75.56,20.47 74.03,18.93 72.95,18.93 71.56,17.55 R4.1 71.56,17.39 v71.56,16.47 | 94.19,48.33 94.34,48.48 C10_SUPERCAP.2 94.19,48.33 | 94.19,48.33 94.03,48.17 91.42,48.17 C8.2 91.26,48.17 90.03,49.4 85.11,49.4 84.03,48.33 84.03,47.86 U3.13 | EPD_C2.1 95.88,18.47 97.11,18.47 EPD_C1.1 97.27,18.47 97.73,18.47 | 96.5,26.78 89.72,26.78 C7.2 | 96.5,26.78 97.57,27.86 D3.1 97.57,28.01 96.8,28.78 96.8,45.71 94.19,48.33 | 97.73,18.47 98.96,19.7 98.96,24.32 96.5,26.78 | 97.73,18.47 110.96,5.23 | 118.5,55.25 119.12,55.25 R2_BAT.1 | 118.5,55.25 117.12,56.63 C2_BAT.2 | 119.43,43.25 119.12,43.55 IC2.2 119.43,43.25 | 119.43,43.25 119.73,42.94 119.73,42.17 117.73,40.17 116.66,40.17 C1_BAT1.2 116.5,40.01 115.73,39.24 114.96,39.24 112.96,41.24 112.96,42.78 R1_PWRUSB.1 112.81,42.94 112.19,43.55 112.19,44.63 118.5,50.94 118.5,55.25
  Top 0.155: 119.43,43.25 121.27,45.09 122.35,45.09 123.43,44.02 125.12,44.02 C3.- 125.28,43.86 126.2,42.94 129.43,42.94 C1_BAT2.2 129.58,42.94 v130.81,42.94 | C2.2 151.13,6.62 149.28,6.62 C1.2 149.13,6.62 149.13,12.47 SENSOR2.5 148.97,12.62 148.67,12.93 148.51,12.93 148.21,13.23 148.21,13.7 148.67,14.16 148.97,14.16 SENSOR2.7 149.13,14.31 149.44,14.31 150.05,14.93 150.36,14.93 | 150.36,14.93 151.9,14.93 SENSOR2.1 152.05,15.08 154.52,17.55 165.44,17.55 J3.1 165.6,17.7 166.06,17.7 166.52,18.16 166.52,49.4 | J2.B12 162.52,51.4 162.52,51.25 J2.A1 162.52,51.09 162.52,50.02 162.98,49.56 J2.MP3 163.13,49.4 166.52,49.4 | 166.52,49.4 166.98,49.4 J2.MP1 | J2.MP1 166.98,49.56 166.98,59.56 J2.MP2 166.98,59.71 163.13,59.71 J2.MP4 162.98,59.56 162.52,59.1 162.52,58.02 J2.A12 162.52,57.87 162.52,57.71 J2.B1 162.36,57.56 157.29,57.56 153.59,53.87 153.59,50.94 152.51,49.86 151.9,49.86 R2-USB.2 151.75,49.86 v150.98,50.63 | 124.5,54.94 125.43,55.87 125.74,55.87 U2.2 | 124.5,54.94 122.81,53.25 122.2,53.25 C1_BAT.2 | U4.1 138.05,53.87 138.05,54.17 138.66,54.79 U4.9 | 138.97,54.94 138.97,55.71 U4.6 | 138.97,54.94 138.82,54.79 U4.9 | 138.97,54.94 139.43,54.48 139.43,53.87 U4.4 139.59,53.71 v139.59,52.79 | 138.97,54.94 U4.9 | C4_USB.2 149.28,45.09 149.28,46.02 C5_USB.2 149.44,46.17 149.75,46.17 v150.98,47.4 | v150.98,50.63 150.67,50.94 146.51,50.94 142.97,47.4 142.36,47.4 R2-USB1.1 142.2,47.4 139.74,49.86 129.58,49.86 124.5,54.94 | 166.52,49.4 J2.MP1 | 110.96,5.23 138.2,5.23 148.51,15.54 149.75,15.54 150.36,14.93 | 27.7,100.96 17.85,91.11 15.39,91.11 J4.G2 | 27.7,100.96 34.94,108.19 44.17,108.19 C6.2
  Top 0.155: J4.P6 4.77,92.8 5.54,92.8 6,93.26 6,101.88 2.62,105.27 TP5.TP 2.46,105.42 2.46,106.65 1.23,107.88 1.23,109.42 2.15,110.35 3.85,110.35 7.08,107.11 | RESET_BUTTON.2 25.7,108.19 22.32,108.19 RESET_BUTTON.1 22.16,108.04 22.16,107.42 v21.7,106.96 | 15.24,103.27 15.24,98.65 C9.2 | 15.24,103.27 v19.39,107.42 20.47,108.5 C5.2 20.62,108.65 20.62,109.58 21.55,110.5 43.86,110.5 46.17,108.19 47.09,108.19 BOOT_BUTTON.1 47.25,108.19 50.63,108.19 BOOT_BUTTON.2 50.79,108.19 51.56,108.96 60.64,108.96 C10.2 60.79,108.96 61.25,108.96 62.18,108.04 CHANGE_BUTTON.1 62.33,108.19 64.64,108.19 | 7.08,107.11 10.93,103.27 15.24,103.27 | U5.29_6 13.54,57.25 14.62,57.25 U5.29_9 | U5.29_5 13.39,55.87 13.39,54.79 U5.29_4 13.54,54.79 14.62,54.79 U5.29_7 | U5.29_8 14.62,56.02 13.54,56.02 U5.29_5 | U5.29_6 13.39,57.1 13.39,56.02 U5.29_5 | v11.23,45.09 12.16,45.09 D11.1 | v10.93,53.56 12,54.63 U5.29_1 12.16,54.79 12.16,55.87 U5.29_2 12.16,56.02 12.16,57.1 U5.29_3 13.39,57.25 U5.29_6 | 6.77,76.8 1.23,82.34 J4.G3 1.23,82.49 2,83.26 2,95.42 J4.G4 2,95.57 0.62,96.96 0.62,109.73 1.85,110.96 6.93,110.96 8.31,109.58 8.31,108.35 7.08,107.11 | 6.77,76.8 7.54,76.03 7.54,66.33 U5.28 7.7,66.18 7.7,65.87 v8.62,64.95 | 6.77,76.8 15.24,85.26 J4.G1 | v28.01,100.65 27.7,100.96 | D9.1 52.79,35.86 v51.86,35.86 50.17,35.86 D8.1 50.02,35.7 47.4,35.7 D6.1 47.25,35.86 46.17,35.86 39.71,42.32 39.71,51.4 D10.1 39.71,51.56 37.71,51.56 36.01,53.25 D12.1 36.01,53.4 36.32,53.4 38.01,55.1 52.63,55.1 52.94,55.4 52.94,55.71 44.94,63.72 | U1.4 33.24,58.33 35.4,58.33 37.09,60.02 U1.9 37.24,60.17 41.4,60.17 44.94,63.72
  Top 0.155: 64.64,108.19 65.56,108.19 CHANGE_BUTTON.2 | 70.95,106.81 67.25,110.5 64.95,110.5 64.64,110.19 64.64,108.19 | 70.95,106.81 74.33,103.42 87.88,103.42 TP4.TP | 70.95,106.81 54.02,89.88 50.02,89.88 C_DELAY.2 49.86,89.88 48.79,90.95 47.4,90.95 47.25,90.8 47.25,90.34 45.55,88.65 45.25,88.65 IC1.3 45.09,88.49 45.09,63.87 44.94,63.72 | U5.1 7.68,47.09 v7.7,47.09 | v150.98,50.63 150.98,49.92 150.12,49.07 D1.5
  Bottom 0.155: v69.87,14.01 69.87,14.77 71.1,16.01 | 71.41,16.31 71.1,16.01 | 71.1,16.01 v74.49,12.62 | v150.98,50.63 150.98,49.4 | 150.98,49.4 v150.98,47.4 | 150.98,49.4 148.36,49.4 144.97,52.79 v139.59,52.79 139.59,51.71 v130.81,42.94 | v19.39,107.42 19.85,106.96 v21.7,106.96 v28.01,100.65 | v8.62,64.95 10.93,62.64 v10.93,53.56 10.93,51.13 11.41,50.65 11.41,50.15 10.93,49.67 10.93,46.69 | v51.86,35.86 71.41,16.31 | 71.41,16.31 v71.56,16.47 | 10.93,46.69 10.93,45.39 v11.23,45.09 11,45 | 10.93,46.69 8.1,46.69 v7.7,47.09
  pour Top: 6.46,48.36 6.24,48.14 6.22,48.12 0.08,48.12 0.08,0.08 79.72,0.08 79.72,10.22 79.74,10.24 79.76,10.26 79.78,10.28 98.62,10.28 98.64,10.26 98.86,10.04 98.88,10.02 98.88,0.28 170.12,0.28 170.12,67.12 92.03,67.12 91.84,66.94 91.82,66.92 91.78,66.92 91.76,66.94 91.74,66.96 91.72,66.98 91.72,111.02 91.74,111.04 91.82,111.12 68.28,111.12 68.28,110.58 68.26,110.56 68.24,110.54 68.22,110.52 19.18,110.52 19.16,110.54 18.94,110.76 18.92,110.78 18.92,111.12 0.08,111.12 0.08,66.83 0.23,66.68 6.42,66.68 6.44,66.66 6.46,66.64 6.48,66.62 6.48,48.38
  pour Bottom: 6.46,48.36 6.24,48.14 6.22,48.12 0.08,48.12 0.08,0.08 79.72,0.08 79.72,10.02 79.74,10.04 79.96,10.26 79.98,10.28 98.62,10.28 98.64,10.26 98.86,10.04 98.88,10.02 98.88,0.28 170.12,0.28 170.12,67.12 91.78,67.12 91.76,67.14 91.74,67.16 91.72,67.18 91.72,110.82 91.74,110.84 91.82,110.92 68.43,110.92 67.67,110.16 67.67,110.16 67.66,110.15 67.65,110.14 67.65,110.14 67.65,110.14 67.63,110.13 67.62,110.13 67.62,110.13 67.62,110.13 67.6,110.13 67.59,110.13 67.59,110.13 0.08,110.72 0.08,66.68 6.42,66.68 6.44,66.66 6.46,66.64 6.48,66.62 6.48,48.38
GPIO8
  Top 0.155: R1.1 20.62,45.86 20.62,46.94 19.24,48.33 19.24,48.63 U5.10
I2C_PW  (via drill 0.35)
  Top 0.155: 147.9,6.16 148.21,6.16 149.13,5.23 C1.1 149.28,5.23 150.98,5.23 151.13,5.39 C2.1 151.28,5.54 152.21,6.46 | 147.9,6.16 147.28,6.16 R1-PINH.2 | 152.21,6.46 153.44,6.46 R2-PINH.2 | 147.9,6.16 147.9,14.16 148.67,14.93 148.97,14.93 SENSOR2.8 | 150.98,13.54 149.13,13.54 SENSOR2.6 | 150.98,13.54 151.59,14.16 151.9,14.16 SENSOR2.2 152.05,14.31 152.36,14.31 v153.13,15.08 | v23.55,64.02 21.7,65.87 21.7,66.18 U5.17 | 152.21,6.46 152.21,11.23 150.98,12.47 150.98,13.54
  Bottom 0.155: v23.55,64.02 148.51,64.02 160.83,51.71 160.83,22.78 v153.13,15.08
INT_RTC  (via drill 0.35)
  Top 0.155: R1-PINH1.1 84.49,60.17 v84.49,58.64 84.49,57.87 85.11,57.25 U3.3 | v16.47,44.02 16.47,48.63 U5.8 16.62,48.79 16.62,49.09 v18.62,51.09 | v3.85,31.4 2.77,30.32 TP15.TP | v41.09,51.09 v75.87,51.09
  Bottom 0.155: v3.85,31.4 v16.47,44.02 | v84.49,58.64 83.41,58.64 v75.87,51.09 | v18.62,51.09 v41.09,51.09
IO/BOOT  (via drill 0.35)
  Top 0.155: v45.25,107.42 44.94,107.11 44.32,107.11 C6.1 | v45.86,109.42 46.94,109.42 47.09,109.58 BOOT_BUTTON.4 47.25,109.73 50.63,109.73 BOOT_BUTTON.3 | v49.71,107.11 52.02,107.11 R_BOOT.1 | v26.62,74.95 20.93,69.25 20.93,68.49 21.55,67.87 22.93,67.87 24.16,66.64 24.16,66.33 U5.15
  Bottom 0.155: v45.86,109.42 45.25,108.81 v45.25,107.42 45.55,107.11 | 45.55,107.11 v49.71,107.11 | v26.62,74.95 28.62,74.95 45.55,91.88 45.55,107.11
IO/CHANGE  (via drill 0.35)
  Top 0.155: C10.1 60.79,107.58 61.1,107.58 61.41,107.27 v63.56,107.27 66.79,107.27 67.1,107.58 R_CHANGE.1 | v63.56,108.81 62.79,109.58 62.33,109.58 CHANGE_BUTTON.4 | v66.95,109.89 66.79,109.73 65.72,109.73 CHANGE_BUTTON.3 | v18.16,70.64 14.16,66.64 14.16,66.33 U5.23
  Bottom 0.155: v66.95,109.89 64.64,109.89 v63.56,108.81 v63.56,107.27 26.93,70.64 v18.16,70.64
MISO  (via drill 0.35)
  Top 0.155: 10.46,91.26 5.69,86.49 4.16,86.49 2.92,87.72 2.92,92.34 4.31,93.72 | 10.46,91.26 11.39,92.19 11.39,99.27 R5.1 | 4.31,93.72 4.92,93.72 J4.P7 4.31,93.72 | 34.01,61.71 33.24,60.94 U1.2 | 34.01,61.71 34.01,68.64 17.85,84.8 | 17.85,84.8 15.7,86.95 14.77,86.95 10.46,91.26 | v40.94,54.48 40.63,54.79 39.71,54.79 38.32,53.4 37.55,53.4 D12.2 | 34.01,61.71 v34.17,61.56 | 17.85,84.8 8.46,75.41 8.46,74.49 8.93,74.03 8.93,66.33 U5.27 | 4.31,93.72 3.85,94.19 3.85,95.88 0.92,98.8 0.92,109.58 2,110.65 4,110.65 5.54,109.11 6.93,109.11 TP6.TP
  Bottom 0.155: v40.94,54.48 40.94,58.79 38.17,61.56 v34.17,61.56
MOSI  (via drill 0.35)
  Top 0.155: v88.95,14.01 88.95,15.08 J1.14 | v56.63,24.62 56.63,26.62 60.17,30.16 60.17,30.78 59.25,31.7 53.4,31.7 R6.1 | v7.54,91.57 5.39,89.42 5.08,89.42 J4.P3 | v10.16,107.58 11.23,108.65 TP7.TP | v31.7,56.33 37.55,56.33 39.4,58.17 40.94,58.17 U1.5 | v17.85,51.71 15.39,49.25 15.39,48.79 U5.7 15.24,48.63 15.24,48.33 13.85,46.94 13.85,45.09 D11.2 13.7,44.94 v13.7,40.32
  Bottom 0.155: v88.95,14.01 89.57,13.39 89.57,12.77 87.57,10.77 70.49,10.77 v56.63,24.62 15.39,24.62 8.31,31.7 8.31,33.09 13.7,38.48 v13.7,40.32 | v10.16,107.58 7.54,104.96 v7.54,91.57 5.23,91.57 2.92,89.26 2.92,72.49 17.85,57.56 v17.85,51.71 26.62,51.71 31.24,56.33 v31.7,56.33
N$1
  Top 0.155: R2-USB.1 151.9,48.48 154.21,50.79 154.21,54.02 156.52,56.33 162.36,56.33 J2.B5
N$2
  Top 0.155: D7.1 83.88,62.18 83.88,60.94 82.03,59.1 82.03,50.17 83.26,48.94 83.26,46.79 85.57,44.48 87.72,44.48 88.34,45.09 R_CAPACITOR.1
N$3  (via drill 0.35)
  Top 0.155: v152.98,51.25 146.36,51.25 143.9,48.79 142.36,48.79 R2-USB1.2 | v159.9,51.25 161.9,53.25 162.36,53.25 J2.A5
  Bottom 0.155: v159.9,51.25 v152.98,51.25
N$4
  Top 0.155: J1.23 84.34,15.08 84.34,14.62 83.26,13.54 70.79,13.54 68.33,11.08 EPD_C11.2
N$5
  Top 0.155: J1.22 84.95,15.24 84.95,16.47 86.03,17.55 86.18,17.55 86.34,17.7 86.34,18.62 85.57,19.39 EPD_C10.2
N$6  (via drill 0.35)
  Top 0.155: v85.42,14.16 85.42,15.08 J1.21 | v86.8,20.32 86.8,19.7 87.11,19.39 EPD_C9.2
  Bottom 0.155: v85.42,14.16 85.42,15.7 85.11,16.01 85.11,18.62 v86.8,20.32
N$7
  Top 0.155: C4.1 104.5,32.47 104.5,31.4 101.11,28.01 D3.2 100.96,28.01 97.73,31.24 97.73,31.55 D4.1
N$8  (via drill 0.35)
  Top 0.155: v85.72,16.31 85.88,16.16 85.88,15.24 J1.20 | v88.03,20.16 88.34,20.16 88.95,19.55 EPD_C8.2
  Bottom 0.155: v85.72,16.31 85.72,17.85 v88.03,20.16
N$9  (via drill 0.35)
  Top 0.155: v86.8,17.08 86.34,16.62 86.34,15.24 J1.19 | v90.03,20.32 90.8,19.55 EPD_C7.2
  Bottom 0.155: v90.03,20.32 v86.8,17.08
N$10  (via drill 0.35)
  Top 0.155: v86.95,16.16 86.95,15.24 J1.18 | v91.72,20.32 92.03,20.32 92.65,19.7 EPD_C6.2
  Bottom 0.155: v86.95,16.16 87.57,16.16 v91.72,20.32
N$11
  Top 0.155: IC1.5 48.02,90.34 49.86,88.49 C_DELAY.1
N$13
  Top 0.155: R1_BAT.2 129.58,58.02 138.2,58.02 140.2,56.02 140.2,52.48 138.2,50.48 130.2,50.48 125.89,54.79 U2.1
N$14
  Top 0.155: CHG_LED.C 120.04,56.94 120.04,64.18 119.73,64.48 119.73,65.56 120.5,66.33 124.35,66.33 128.81,61.87 128.81,57.56 129.43,56.94 R1_BAT.1
N$15  (via drill 0.35)
  Top 0.155: C1_BAT1.1 115.42,40.17 115.42,42.17 D2.1 115.58,42.32 117.43,42.32 118.19,43.09 | 118.19,43.09 118.66,42.63 118.97,42.63 IC2.3 | 118.19,43.09 118.19,43.86 118.66,44.32 118.97,44.32 IC2.1 119.12,44.48 v122.81,48.17 | v133.74,48.17 133.74,49.09 Q2.2
  Bottom 0.155: v122.81,48.17 v133.74,48.17
N$16  (via drill 0.35)
  Top 0.155: v120.81,54.17 120.5,54.48 120.5,55.1 R2_BAT.2 | v122.35,54.02 123.12,54.79 U2.5
  Bottom 0.155: v120.81,54.17 122.2,54.17 v122.35,54.02
N$17  (via drill 0.35)
  Top 0.155: v95.73,13.39 93.72,13.39 93.42,13.7 93.42,15.08 J1.5 | v98.34,20.01 97.42,20.01 97.27,19.85 EPD_C1.2
  Bottom 0.155: v95.73,13.39 96.03,13.39 98.34,15.7 v98.34,20.01
N$18  (via drill 0.35)
  Top 0.155: v94.03,14.01 93.88,14.16 J1.4 | v96.65,20.62 95.88,19.85 EPD_C2.2
  Bottom 0.155: v94.03,14.01 96.19,14.01 97.42,15.24 97.42,19.85 v96.65,20.62
N$19
  Top 0.155: J1.24 83.88,15.08 73.41,15.08 72.95,14.62 65.56,14.62 EPD_C12.2
RESE  (via drill 0.35)
  Top 0.155: v96.8,16.01 96.8,14.62 96.19,14.01 94.96,14.01 94.5,14.47 94.5,15.08 J1.3 | 84.03,28.01 83.26,28.01 83.11,28.16 R3.2 | 84.03,28.01 84.03,26.32 85.57,24.78 85.57,23.86 82.8,21.08 75.1,21.08 73.87,19.85 72.8,19.85 Q3.2 | v85.87,27.24 85.1,28.01 84.03,28.01
  Bottom 0.155: v85.87,27.24 96.8,16.3 v96.8,16.01
RESE'
  Top 0.155: R3.1 83.11,26.78 85.26,24.62 85.26,24.01 83.11,21.85 75.72,21.85 R2.2 75.56,21.7 75.26,21.7 74.64,21.08 70.95,21.08 64.79,14.93 64.79,14.01 65.25,13.54 65.25,11.85 SJ1.2
RESET  (via drill 0.35)
  Top 0.155: 27.39,107.27 22.93,107.27 22.01,106.34 21.39,106.34 20.62,107.11 C5.1 20.62,107.27 21.24,107.88 21.24,108.65 22.16,109.58 RESET_BUTTON.4 22.32,109.73 25.7,109.73 RESET_BUTTON.3 | v43.25,90.49 45.09,90.49 IC1.1 | 27.39,107.27 v27.39,106.34 | 27.39,107.27 R_RESET.1 | v10,46 10,48.5 U5.3
  Bottom 0.155: v43.25,90.49 v27.39,106.34 27.5,106.5 25.5,108.5 2.5,108.5 2.5,72 6.5,68 6.5,47 7.5,46 v10,46
RTC_RST  (via drill 0.35)
  Top 0.155: v25.39,63.41 22.93,65.87 22.93,66.18 U5.16 | v82.64,58.79 83.88,57.56 83.88,57.25 U3.4
  Bottom 0.155: v25.39,63.41 78.03,63.41 v82.64,58.79
RX
  Top 0.155: U5.24 12.77,66.33 12.77,73.41 14.31,74.95 TP2.TP
SCK  (via drill 0.35)
  Top 0.155: v88.95,13.08 89.57,13.7 89.57,14.31 89.42,14.47 89.42,15.08 J1.13 | v51.09,31.09 50.33,31.86 R7.1 | v40.01,58.79 40.63,59.41 40.94,59.41 U1.6 | v40.01,54.17 40.01,53.25 39.86,53.1 D10.2 39.86,52.94 40.48,52.33 40.48,50.94 40.01,50.48 40.01,46.32 46.32,40.01 v46.32,36.63 | v24.47,56.94 21.85,56.94 14.16,49.25 14.16,48.79 U5.6 | v3.54,88.95 3.54,90.8 4.31,91.57 4.92,91.57 J4.P5 | v22.47,81.11 22.93,80.64 24.01,80.64 TP8.TP
  Bottom 0.155: v88.95,13.08 86.18,13.08 84.18,11.08 71.1,11.08 v51.09,31.09 51.09,31.86 v46.32,36.63 | v40.01,54.17 40.01,57.25 | 40.01,57.25 v40.01,58.79 | 40.01,57.25 31.24,57.25 30.63,56.63 25.09,56.63 24.78,56.94 v24.47,56.94 17.55,63.87 17.55,74.95 16.93,75.56 | 16.93,75.56 v3.54,88.95 | 16.93,75.56 v22.47,81.11
SCL  (via drill 0.35)
  Top 0.155: R2-PINH.1 153.59,5.23 153.59,5.54 154.21,6.16 154.21,10.46 v153.75,10.93 152.05,12.62 SENSOR2.4 | v163.29,20.47 165.44,20.47 J3.4 | v130.66,56.48 138.2,56.48 138.51,56.17 138.51,55.87 U4.7 | v88.65,47.86 87.88,47.86 U3.16 | v17.85,62.64 17.85,66.18 U5.20
  Bottom 0.155: v153.75,10.93 154.98,12.16 | 154.98,12.16 v163.29,20.47 | v17.85,62.64 24.16,56.33 30.78,56.33 31.4,56.94 36.32,56.94 45.4,47.86 v88.65,47.86 97.27,56.48 v130.66,56.48 155.59,56.48 160.52,51.56 160.52,50.94 152.51,42.94 152.51,14.62 154.98,12.16
SDA  (via drill 0.35)
  Top 0.155: 154.52,11.23 154.52,5.08 154.05,4.62 148.51,4.62 148.21,4.92 147.28,4.92 R1-PINH.1 | 154.52,11.23 152.36,13.39 152.05,13.39 SENSOR2.3 | 154.52,11.23 v154.98,11.23 | J3.3 165.44,19.55 v163.29,19.55 160.36,19.55 v133.43,46.48 | v129.28,55.71 138.05,55.71 U4.8 | v90.03,48.33 89.11,48.33 v88.65,48.79 88.34,49.09 87.42,49.09 86.49,48.17 86.49,47.86 U3.15 | v19.7,64.95 19.24,65.41 19.24,66.18 U5.19
  Bottom 0.155: v154.98,11.23 v163.29,19.55 | v90.03,48.33 97.42,55.71 v129.28,55.71 135.28,49.71 135.28,48.33 v133.43,46.48 | v19.7,64.95 21.7,64.95 24.01,62.64 63.41,62.64 77.26,48.79 v88.65,48.79
SRC  (via drill 0.35)
  Top 0.155: v97.42,34.01 104.5,34.01 C4.2 | 92.03,36.17 91.57,36.63 D5.2 | 92.03,36.17 v94.19,34.01 | v74.64,22.01 72.18,22.01 Q3.3 | 92.03,36.17 87.57,31.7 87.57,31.4 L1.1
  Bottom 0.155: v97.42,34.01 v94.19,34.01 91.72,34.01 79.72,22.01 v74.64,22.01
SS_SD  (via drill 0.35)
  Top 0.155: R10.1 8.16,99.11 8.16,91.11 5.39,88.34 J4.P2 5.23,88.19 4,88.19 v3.69,87.88 | v40.63,46.63 50.02,37.24 D8.2 | v11.85,47.4 11.85,48.33 11.54,48.63 U5.4 11.54,48.79 11.54,49.09 v18.47,56.02
  Bottom 0.155: v40.63,46.63 27.24,46.63 25.86,48.02 12.47,48.02 v11.85,47.4 | v3.69,87.88 3.69,72.18 18.47,57.41 v18.47,56.02
TX
  Top 0.155: U5.25 11.39,66.33 11.39,73.41 9.85,74.95 TP1.TP
USB_D+  (via drill 0.35)
  Top 0.155: v22.01,47.25 22.47,46.79 23.24,46.79 24.16,47.71 24.16,48.63 U5.14 | D1.4 149.75,48.02 149.57,48.02 v148.67,47.11
  Bottom 0.155: v22.01,47.25 22.47,46.79 26.16,46.79 30.63,42.32 131.12,42.32 135.91,47.11 v148.67,47.11
USB_D-  (via drill 0.35)
  Top 0.155: v134.66,48.63 136.66,46.63 142.82,46.63 143.13,46.94 143.13,47.09 146.67,50.63 148.97,50.63 149.44,50.17 149.75,50.17 D1.6 | v22.93,47.4 22.93,48.63 U5.13
  Bottom 0.155: v134.66,48.63 134.66,48.17 133.59,47.09 90.19,47.09 89.11,46.02 27.39,46.02 26.01,47.4 v22.93,47.4
VBAT
  Top 0.3: U4.3 U4.2 138.47,53.72 138.47,53.3 138.27,53.1 134.55,53.1 Q2.3 127.34,56.63 126.01,56.63 U2.3 125.61,57.03 125.61,58.03 124.6,59.04 124.6,65.4 124.2,65.8 120.6,65.8 120.2,65.4 120.2,64.6 121,63.8 121,58.97 122.4,57.57 121.08,57.57 120.8,57.3 120.8,56.34 120.62,56.17 118.82,56.17 117.48,57.5 116.53,57.5 115.78,56.75 C2_BAT.1 105.5,66.96 92.1,66.96 91.96,67.1 91.96,80.5 88.05,84.41 TP3.TP
VBUS
  Top 0.3: PFMF.050.1.2 148.89,44 C4_USB.1 147.94,46.04 C5_USB.1 146.91,47.29 146.32,47.29 145.46,48.16 145.46,48.72 145.86,49.12 146.42,49.12 146.54,49 146.8,49 146.87,49.07 D1.2 147.87,49.07 148.42,48.52 148.42,47.86 146.67,46.11 134.81,46.11 Q2.1 124.69,49.16 C1_BAT.1 | C1_BAT.1 122.05,51.87 121.3,52.62 121.3,53.58 121.6,53.88 CHG_LED.A 121.67,56.8 123.18,56.8 U2.4 122.89,57.15 TP14.TP | R1_PWRUSB.2 113.18,44.39 D2.2 115.52,45.27 C1_BAT.1
VRTC
  Top 0.3: C10_SUPERCAP.1 93.97,46.75 C8.1 88.72,46.75 R_CAPACITOR.2 85.2,47.09 U3.14
VUSB
  Top 0.3: PFMF.050.1.1 145.91,41.8 148.01,39.7 149.76,39.7 151.87,41.8 160,41.8 161.8,43.6 161.8,48.23 161.64,48.38 161.64,51.78 161.82,51.96 162.47,51.96 J2.A4 J2.B9 163.17,52.31 163.7,52.84 163.7,56.28 163.22,56.76 162.57,56.76 J2.B4 J2.A9

## Text on the board
tPlace: 3V3 | MISO | MOSI | GND | GND | VBAT | SCK | TX | RX | EPD_3V3_C | EPD_BUSY | VBUS | INT_RTC | EPD_CS | EPD_RST | EPD_3V3 | EPD_DC